# EAGLE board board (EAGLE 9.2.0)
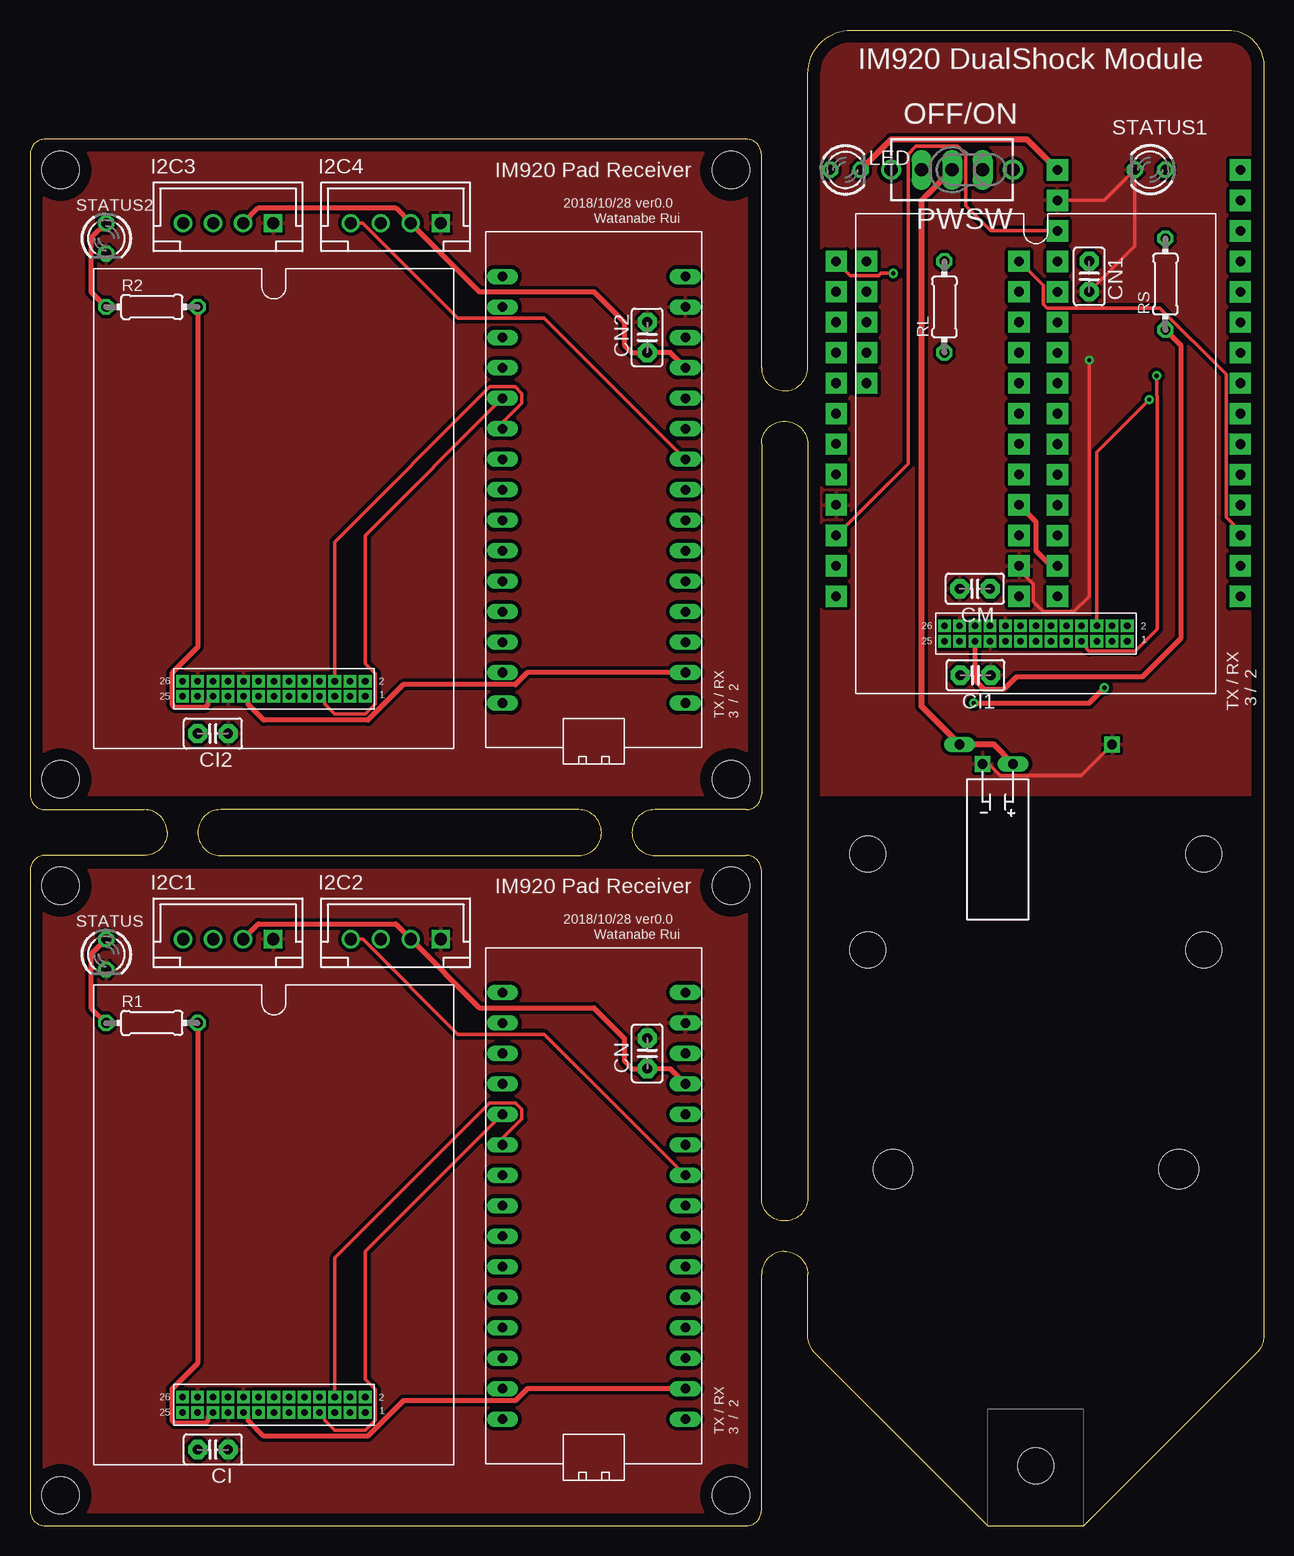
[diagram p0: board, top side]
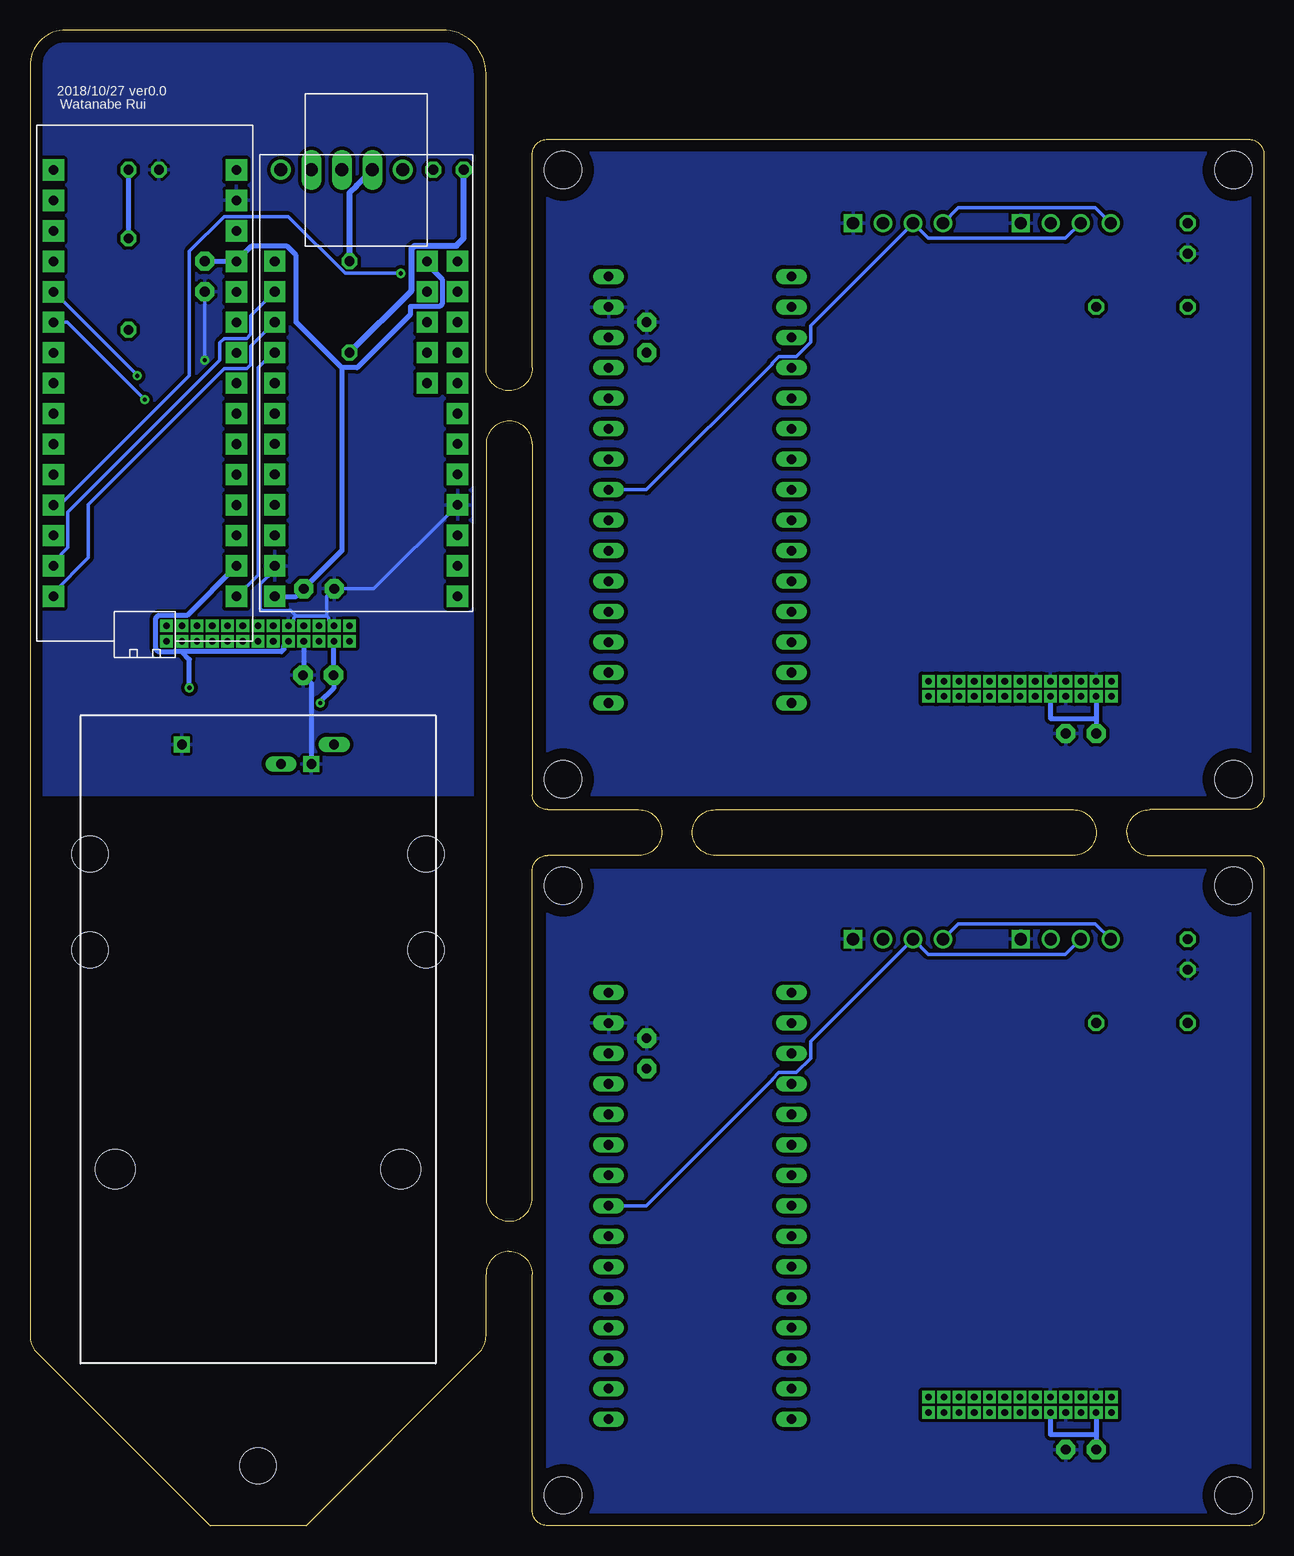
[diagram p1: board, bottom side, seen from below]

Size 102.82 x 124.69 mm. Coordinates in mm from the lower left corner, seen from the top.
Outline: 1.27,0 59.69,0 arc90 60.96,1.27 60.96,20.95 arc-90 62.87,22.86 arc-90 64.82,20.95 64.82,15.83 arc45 65.41,14.41 79.82,0 87.82,0 102.23,14.41 arc45 102.82,15.83 102.82,121.69 arc90 99.82,124.69 68.45,124.69 arc90 64.82,121.05 64.82,96.52 arc-90 62.87,94.61 arc-90 60.96,96.52 60.96,114.3 arc90 59.69,115.57 1.27,115.57 arc90 0,114.3 0,60.96 arc90 1.27,59.69 9.53,59.69 arc-90 11.43,57.78 arc-90 9.53,55.88 1.27,55.88 arc90 0,54.61 0,1.27 arc90 1.27,0
Outline: 60.96,27.3 60.96,54.61 arc90 59.69,55.88 52.07,55.88 arc-90 50.16,57.78 arc-90 52.07,59.69 59.69,59.69 arc90 60.96,60.96 60.96,90.17 arc-90 62.87,92.08 arc-90 64.82,90.17 64.82,27.3 arc-90 62.87,25.4 arc-90 60.96,27.3
Outline: 15.88,59.69 arc90 13.97,57.78 arc90 15.88,55.88 45.72,55.88 arc90 47.62,57.78 arc90 45.72,59.69 15.88,59.69
Copper layers (1*16): Top 0.035mm / dielectric 1.5mm / Bottom 0.035mm
Design rules "default *": minimum track width 6mil, minimum drill 0.35mm, track to track 6mil, track to pad 6mil, pad to pad 6mil, via to via 6mil, smd to smd 6mil, copper to edge 40mil, drill to drill 6mil, minimum pad ring 10mil, minimum via ring 8mil, stop-mask expansion 4mil, vias tented up to drill 0mil, thermal gap 10mil
Holes 3.1 mm at 2.54,2.54 58.42,2.54 2.54,53.34 58.42,53.34 2.54,62.23 58.42,62.23 2.54,113.03 58.42,113.03
Holes 3 mm at 69.82,56 97.82,56 69.82,48 97.82,48 83.82,5

## Footprints (pad centres in the part's own frame; a part is rotated, then mirrored left to right if it is on the bottom)
C2.5-2 = drill 0.813 pad 1.6 octagon: 1 -1.27,0; 2 1.27,0
B4B-XH-A = drill 1.016 square: 1 -3.75,0 | drill 1.016: 2 -1.25,0; 3 1.25,0; 4 3.75,0
LED3MM = drill 0.813 octagon: A -1.27,0; K 1.27,0
TL3XYO = drill 1.1 pad 1.422 long: 1 -2.54,0; 2 0,0; 3 2.54,0 | drill 1.1 pad 1.676: M1 -5.08,0; M2 5.08,0
0204/7 = drill 0.813 octagon: 1 -3.81,0; 2 3.81,0
IM920 = drill 0.55 pad 1 square: GND -6.35,5.635; MODE1 -2.54,4.365; MODE2 -2.54,5.635; MODE3 -3.81,4.365; P$1 7.62,4.365; P$2 7.62,5.635; P$3 6.35,4.365; P$4 6.35,5.635; P$5 5.08,4.365; P$8 3.81,5.635; P$9 2.54,4.365; P$10 2.54,5.635; P$11 1.27,4.365; P$12 1.27,5.635; P$13 0,4.365; P$14 0,5.635; P$15 -1.27,4.365; P$16 -1.27,5.635; P$20 -3.81,5.635; P$22 -5.08,5.635; P$25 -7.62,4.365; P$26 -7.62,5.635; RX 5.08,5.635; STATUS -5.08,4.365; TX 3.81,4.365; VCC -6.35,4.365
NANO = drill 0.8 long: 3.3V -7.62,15.24; 5V -7.62,-10.16; A0 -7.62,10.16; A1 -7.62,7.62; A2 -7.62,5.08; A3 -7.62,2.54; A4 -7.62,0; A5 -7.62,-2.54; A6 -7.62,-5.08; A7 -7.62,-7.62; AREF -7.62,12.7; D2 7.62,-7.62; D3 7.62,-5.08; D4 7.62,-2.54; D5 7.62,0; D6 7.62,2.54; D7 7.62,5.08; D8 7.62,7.62; D9 7.62,10.16; D10 7.62,12.7; D11 7.62,15.24; D12 7.62,17.78; D13 -7.62,17.78; GND -7.62,-15.24; GND1 7.62,-10.16; RAW -7.62,-17.78; RST -7.62,-12.7; RST1 7.62,-12.7; RX1 7.62,-15.24; TX0 7.62,-17.78
USBMINI = drill 0.8 pad 1.778 square: 3V3 0,-7.62; GND 0,-2.54; GND1 -15.24,-7.62; INT -15.24,-27.94; MISO 0,-22.86; MOSI 0,-25.4; P$1 -12.7,-20.32; P$2 -12.7,-22.86; P$3 0,-5.08; P$4 -12.7,-25.4; P$5 0,-10.16; P$6 0,-12.7; P$7 0,-15.24; P$8 0,-17.78; P$9 -12.7,-17.78; P$13 -15.24,0; P$14 -15.24,-2.54; P$17 -15.24,-10.16; P$18 -15.24,-12.7; P$19 -15.24,-15.24; P$20 -15.24,-17.78; P$21 -15.24,-20.32; P$22 -15.24,-22.86; P$23 -15.24,-25.4; RAW 0,0; RESET -15.24,-5.08; SCK 0,-20.32; SS 0,-27.94; VBUS -12.7,-27.94
C-10U = drill 0.8 long: + -1.27,0 | drill 0.8 square: - 1.27,0
NANO' = drill 0.8 pad 1.778 square: 3.3V -7.62,15.24; 5V -7.62,-10.16; A0 -7.62,10.16; A1 -7.62,7.62; A2 -7.62,5.08; A3 -7.62,2.54; A4 -7.62,0; A5 -7.62,-2.54; A6 -7.62,-5.08; A7 -7.62,-7.62; AREF -7.62,12.7; D2 7.62,-7.62; D3 7.62,-5.08; D4 7.62,-2.54; D5 7.62,0; D6 7.62,2.54; D7 7.62,5.08; D8 7.62,7.62; D9 7.62,10.16; D10 7.62,12.7; D11 7.62,15.24; D12 7.62,17.78; D13 -7.62,17.78; GND -7.62,-15.24; GND1 7.62,-10.16; RAW -7.62,-17.78; RST -7.62,-12.7; RST1 7.62,-12.7; RX1 7.62,-15.24; TX0 7.62,-17.78
BH-9V-1P = drill 0.8 long: 9V -6.35,2.4 | drill 0.8 pad 1.27 square: GND 6.35,2.4 | hole 3.3: -11.9,37.8; 11.9,37.8

## Placement (x,y rotation side)
CI  [C2.5-2]  15.24,6.35 180 top
CI1  [C2.5-2]  78.79,70.9 180 top
CI2  [C2.5-2]  15.24,66.04 180 top
CM  [C2.5-2]  78.74,78.11 180 top
CN  [C2.5-2]  51.44,39.37 90 top
CN1  [C2.5-2]  88.27,104.14 270 top
CN2  [C2.5-2]  51.44,99.06 90 top
I2C1  [B4B-XH-A]  16.51,48.9 180 top
I2C2  [B4B-XH-A]  30.48,48.9 180 top
I2C3  [B4B-XH-A]  16.51,108.58 180 top
I2C4  [B4B-XH-A]  30.48,108.58 180 top
LED  [LED3MM]  67.94,113.03 0 top
PWSW  TL36YO  [TL3XYO]  76.83,113.03 180 top
R1  [0204/7]  10.16,41.91 0 top
R2  [0204/7]  10.16,101.6 0 top
RL  [0204/7]  76.2,101.6 90 top
RS  [0204/7]  94.61,103.5 90 top
STATUS  [LED3MM]  6.35,47.62 270 top
STATUS1  [LED3MM]  93.34,113.03 180 top
STATUS2  [LED3MM]  6.35,107.31 270 top
U$1  IM920  [IM920]  20.32,5.08 0 top
U$2  NANO  [NANO]  46.99,26.67 180 top
U$3  IM920  [IM920]  83.82,69.37 0 top
U$4  MINI-USBHOSTSHIELD  [USBMINI]  82.42,77.47 180 bottom
U$5  C-10U  [C-10U]  80.64,63.5 180 top
U$6  NANO  [NANO']  93.24,95.24 180 bottom
U$7  BH-9V-1P  [BH-9V-1P]  83.82,67.52 180 bottom
U$8  IM920  [IM920]  20.32,64.77 0 top
U$9  NANO  [NANO]  46.99,86.36 180 top

## Library data of the parts
CI CI1 CI2 CM CN CN1 CN2 = capacitor-wima
I2C1-I2C4 = jst-xh
LED STATUS STATUS1 STATUS2 = led
PWSW = switch
R1 R2 RL RS = rcl; SPICEPREFIX: R
U$1 U$3 U$8 = im920
U$2 U$9 = Arduino-clone
U$4 = miniUSBHostShield
U$5 = C-10uF
U$6 = Arduino
U$7 = BH-9V-1P

## Nets
3V3: CI1.2 U$3.MODE1 U$3.VCC U$4.3V3 U$6.3.3V
5V: CN.1 I2C1.2 I2C2.2 U$2.5V
5V1: CM.1 CN1.1 U$4.RAW U$4.VBUS U$6.5V
5V2: CN2.1 I2C3.2 I2C4.2 U$9.5V
GND: CI.1 CN.2 I2C1.1 I2C2.1 STATUS.K U$1.GND U$1.MODE2 U$1.MODE3 U$2.GND
GND1: CI1.1 CM.2 CN1.2 STATUS1.K U$3.GND U$3.MODE2 U$3.MODE3 U$4.GND U$4.GND1 U$5.- U$6.GND U$7.GND
GND2: CI2.1 CN2.2 I2C3.1 I2C4.1 STATUS2.K U$8.GND U$8.MODE2 U$8.MODE3 U$9.GND
N$1: U$1.TX U$2.D2
N$2: U$1.RX U$2.D3
N$3: CI.2 U$1.MODE1 U$1.VCC U$2.3.3V
N$4: R1.2 U$1.STATUS
N$5: R1.1 STATUS.A
N$6: RS.2 STATUS1.A
N$7: RS.1 U$3.STATUS
N$8: U$3.TX U$6.D2
N$9: PWSW.3 RL.2
N$10: LED.A RL.1
N$11: PWSW.2 U$5.+ U$7.9V
N$12: U$4.INT U$6.D9
N$13: U$4.SS U$6.D10
N$14: U$3.RX U$6.D3
N$15: U$4.MOSI U$6.D11
N$16: U$4.MISO U$6.D12
N$17: U$4.SCK U$6.D13
N$18: U$8.TX U$9.D2
N$19: U$8.RX U$9.D3
N$20: CI2.2 U$8.MODE1 U$8.VCC U$9.3.3V
N$21: R2.2 U$8.STATUS
N$22: R2.1 STATUS2.A
RST: U$4.RESET U$6.RST
SCL: I2C1.4 I2C2.4 U$2.A5
SCL1: I2C3.4 I2C4.4 U$9.A5
SDA: I2C1.3 I2C2.3 U$2.A4
SDA1: I2C3.3 I2C4.3 U$9.A4
VIN: LED.K U$6.RAW

## Tracks (layer width: path | path; a pad name or v marks a point on that pad's centre or on a via)
3V3  (via drill 0.35)
  Top 0.4: U$4.3V3 83.82,83.69 83.82,81.28 85.09,80 U$6.3.3V | v78.64,68.58 88.27,68.58 v89.53,69.85
  Bottom 0.152: 90.81,72.86 90.98,72.85
  Bottom 0.4: U$6.3.3V 89.73,75.89 92.08,75.89 | 92.08,75.89 92.11,75.89 92.32,75.68 92.32,73.06 92.11,72.86 92.06,72.86 92.05,72.85 90.98,72.85 | 81.67,73.35 81.67,73.06 | 81.67,73.06 81.88,72.86 | 81.88,72.86 90.17,72.86 | 90.17,72.86 90.81,72.86 | 92.08,75.89 | v78.64,68.58 78.74,68.58 77.52,69.8 CI1.2 77.52,73.69 U$3.VCC | v89.53,69.85 89.53,72.22 90.17,72.86 | 81.88,72.86 81.67,73.06 | 81.67,73.06 81.67,73.35 | 81.67,73.35 U$3.MODE1
5V
  Top 0.4: I2C1.2 19.03,50.16 30.46,50.16 I2C2.2 37.45,43.18 46.99,43.18 49.53,40.64 49.53,38.73 50.16,38.1 CN.1 53.34,38.1 U$2.5V
5V1
  Bottom 0.4: U$4.VBUS 69.72,105.15 68.48,103.91 68.48,101.83 68.69,101.63 71.09,101.63 71.12,101.6 71.12,100.97 75.56,96.52 76.83,96.52 | 76.83,96.52 77.15,96.84 80.64,100.33 80.64,105.91 81.39,106.65 84.37,106.65 U$6.5V CN1.1 | U$4.RAW 80.64,77.47 CM.1 76.83,81.28 76.83,96.52
5V2
  Top 0.4: I2C3.2 19.03,109.86 30.46,109.86 I2C4.2 37.45,102.87 46.99,102.87 49.53,100.33 49.53,98.42 50.16,97.79 CN2.1 53.34,97.79 U$9.5V
GND
  pour Bottom (isolate 0.3): 0,54.61 0,0 59.69,0 59.69,54.61
  pour Top (isolate 0.3): 59.69,0 59.69,54.61 0,54.61 0,0
GND1  (via drill 0.35)
  Top 0.3: CN1.2 92.08,106.68 STATUS1.K 89.53,110.48 U$6.GND | v88.27,97.16 88.27,77.47 87,76.2 84.45,76.2 83.61,77.04 83.61,78.48 82.42,79.68 U$4.GND | U$5.- 79.91,63.5 80.86,62.54 87.59,62.54 U$7.GND
  Bottom 0.3: 78.09,75.84 77.91,75.66 77.91,75.45 U$3.GND | 80.64,75.84 80.66,75.84 80.84,75.66 80.84,75.45 U$3.MODE2 | 80.64,75.84 78.09,75.84 | U$4.GND1 74.17,78.11 CM.2 78.09,77.49 78.09,75.84 | 80.64,75.84 81.08,76.28 83.44,76.28 83.61,76.46 83.61,78.48 82.42,79.68 U$4.GND | CN1.2 v88.27,97.16
  Bottom 0.4: U$5.- 79.38,70.21 CI1.1 80.01,70.95 U$3.MODE3
  pour Bottom (isolate 0.3): 64.77,124.46 64.77,60.96 102.87,60.96 102.87,124.46
  pour Top (isolate 0.3): 64.77,60.96 102.87,60.96 102.87,124.46 64.77,124.46
GND2
  pour Bottom (isolate 0.3): 0,115.57 0,60.96 59.69,60.96 59.69,115.57
  pour Top (isolate 0.3): 59.69,60.96 59.69,115.57 0,115.57 0,60.96
N$1
  Top 0.3: U$2.D2 27.94,22.86 27.94,12.2 28.77,11.37 28.77,8.79 27.94,7.96 25.4,7.96 24.57,8.79 24.57,9.01 U$1.TX
N$2
  Top 0.3: U$2.D3 39.37,32.28 40.98,33.89 40.98,34.69 40.42,35.25 38.32,35.25 25.4,22.33 U$1.RX
N$3
  Top 0.4: U$2.3.3V 41.45,11.43 40.44,10.42 31.11,10.42 28.15,7.46 19.48,7.46 18.17,8.77 18.17,9.06 U$1.MODE1
  Bottom 0.4: U$1.VCC 13.97,7.62 | 13.97,7.62 CI.2 | U$1.MODE1 17.78,7.62 13.97,7.62
N$4
  Top 0.4: R1.2 13.97,13.54 11.82,11.39 11.82,8.77 12.03,8.56 14.64,8.56 14.85,8.77 14.85,9.06 U$1.STATUS
N$5
  Top 0.4: STATUS.A 5.08,47.62 5.08,43.18 R1.1
N$6
  Bottom 0.4: STATUS1.A RS.2
N$7
  Top 0.4: U$3.STATUS 78.74,70.48 79.48,69.75 81.17,69.75 82.21,70.78 92.73,70.78 95.89,73.94 95.89,98.42 RS.1
N$8  (via drill 0.35)
  Top 0.3: v93.88,95.86 93.88,94.23 93.95,94.16 93.95,74.76 92.09,72.91 88.25,72.91 88.07,73.08 88.07,73.3 U$3.TX
  Bottom 0.152: 93.94,95.92 v93.88,95.86
  Bottom 0.3: U$6.D2 93.94,95.95 93.94,95.92
N$9
  Bottom 0.5: PWSW.3 75.61,111.72 75.61,111.7 76.2,111.1 RL.2
N$10
  Bottom 0.5: LED.A 66.67,107.31 67.29,106.7 70.78,106.7 71.01,106.47 71.01,102.98 RL.1
N$11
  Top 0.5: U$5.+ 80.29,65.12 U$7.9V 74.3,68.3 74.3,110.49 74.78,110.98 74.8,110.98 75.52,111.7 75.52,111.72 PWSW.2
N$12  (via drill 0.35)
  Top 0.3: v71.93,104.39 70.91,104.39 70.74,104.22 68.37,104.22 U$4.INT
  Bottom 0.3: v71.93,104.39 76.56,104.39 81.28,109.12 84.59,109.12 84.61,109.14 86.63,109.14 89.53,106.23 89.53,95.89 100.33,85.08 U$6.D9
N$13
  Top 0.3: U$4.SS 84.43,103.4 84.43,101.85 84.76,101.52 94.16,101.52 99.67,96 99.67,84.07 100.86,82.88 U$6.D10
N$14  (via drill 0.35)
  Top 0.3: U$3.RX 88.9,89.51 v93.27,93.88
  Bottom 0.3: v93.27,93.88 99.72,100.33 U$6.D3
N$15
  Bottom 0.3: U$4.MOSI 84.43,100.86 84.43,99.31 84.76,98.98 86.63,98.98 87,98.61 87,97.16 99.67,84.48 99.67,81.53 100.86,80.34 U$6.D11
N$16
  Bottom 0.3: U$4.MISO 84.43,98.32 84.43,96.77 84.76,96.44 86.63,96.44 97.95,85.12 97.95,80.71 100.86,77.8 U$6.D12
N$17
  Bottom 0.3: U$6.D13 83.82,79.26 83.82,96.52 82.55,97.79 U$4.SCK
N$18
  Top 0.3: U$9.D2 27.94,82.55 27.94,71.89 28.77,71.06 28.77,68.48 27.94,67.65 25.4,67.65 24.57,68.48 24.57,68.7 U$8.TX
N$19
  Top 0.3: U$9.D3 39.37,91.97 40.98,93.58 40.98,94.38 40.42,94.94 38.32,94.94 25.4,82.02 U$8.RX
N$20
  Top 0.4: U$9.3.3V 41.45,71.12 40.44,70.11 31.11,70.11 28.15,67.15 19.48,67.15 18.17,68.46 18.17,68.75 U$8.MODE1
  Bottom 0.4: U$8.VCC 13.97,67.31 | 13.97,67.31 CI2.2 | U$8.MODE1 17.78,67.31 13.97,67.31
N$21
  Top 0.4: R2.2 13.97,73.23 11.82,71.08 11.82,68.46 12.03,68.25 14.64,68.25 14.85,68.46 14.85,68.75 U$8.STATUS
N$22
  Top 0.4: STATUS2.A 5.08,107.31 5.08,102.87 R2.1
RST
  Top 0.3: U$4.RESET 73.17,88.53 73.17,114.32 73.83,114.98 77.3,114.98 77.96,114.32 77.96,110.05 80.06,107.94 U$6.RST
SCL
  Top 0.3: I2C2.4 27.73,48.9 35.67,40.95 42.87,40.95 U$2.A5
  Bottom 0.3: I2C1.4 14.03,50.16 25.46,50.16 I2C2.4
SCL1
  Top 0.3: I2C4.4 27.73,108.58 35.67,100.64 42.87,100.64 U$9.A5
  Bottom 0.3: I2C3.4 14.03,109.86 25.46,109.86 I2C4.4
SDA
  Bottom 0.3: I2C1.3 16.53,47.62 27.96,47.62 I2C2.3 37.76,40.37 37.76,38.97 38.95,37.79 40.42,37.79 40.98,37.23 40.98,37.15 51.45,26.67 U$2.A4
SDA1
  Bottom 0.3: I2C3.3 16.53,107.31 27.96,107.31 I2C4.3 37.76,100.06 37.76,98.66 38.95,97.48 40.42,97.48 40.98,96.92 40.98,96.83 51.45,86.36 U$9.A4
VIN
  Top 0.5: LED.K 71.75,115.57 83.07,115.57 U$6.RAW

## Text on the board
tPlace: IM920 DualShock Module | OFF/ON | IM920 Pad Receiver | 2018/10/28 ver0.0 | Watanabe Rui | TX / RX / 3 / 2 | TX / RX / 3 / 2 | IM920 Pad Receiver | 2018/10/28 ver0.0 | Watanabe Rui | TX / RX / 3 / 2
bPlace: 2018/10/27 ver0.0 | Watanabe Rui